# EAGLE board Simple_Motherboard (EAGLE 6.5.0), part 1 of 2
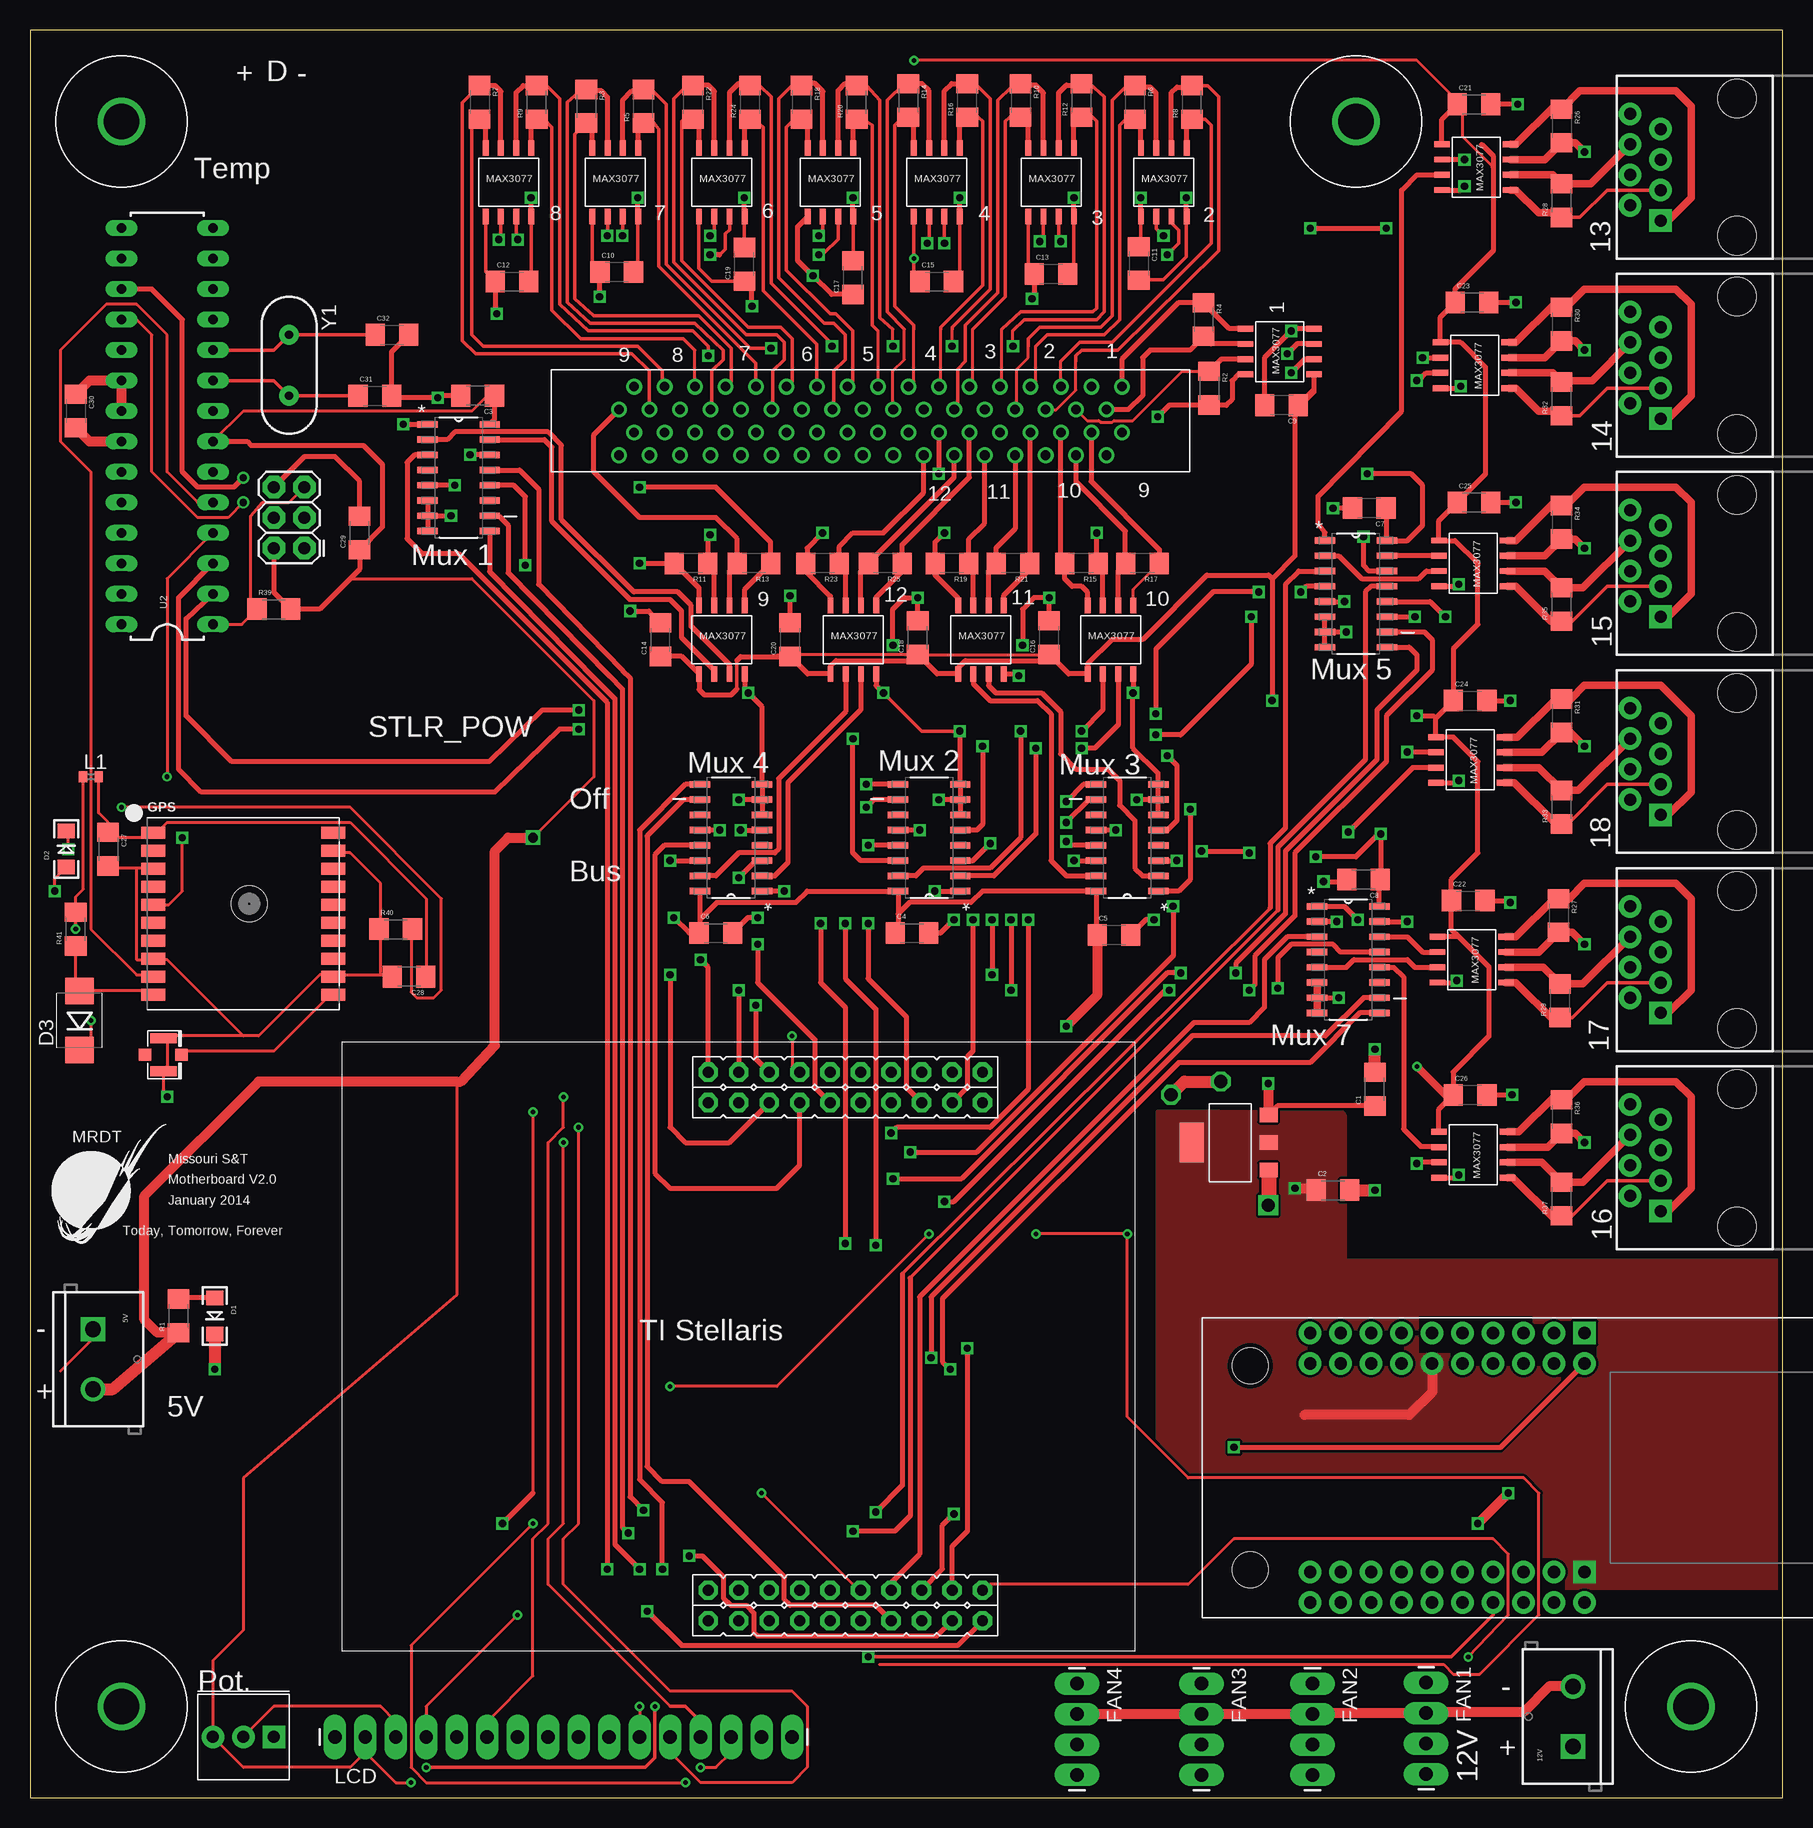
[diagram p0: board, top side]
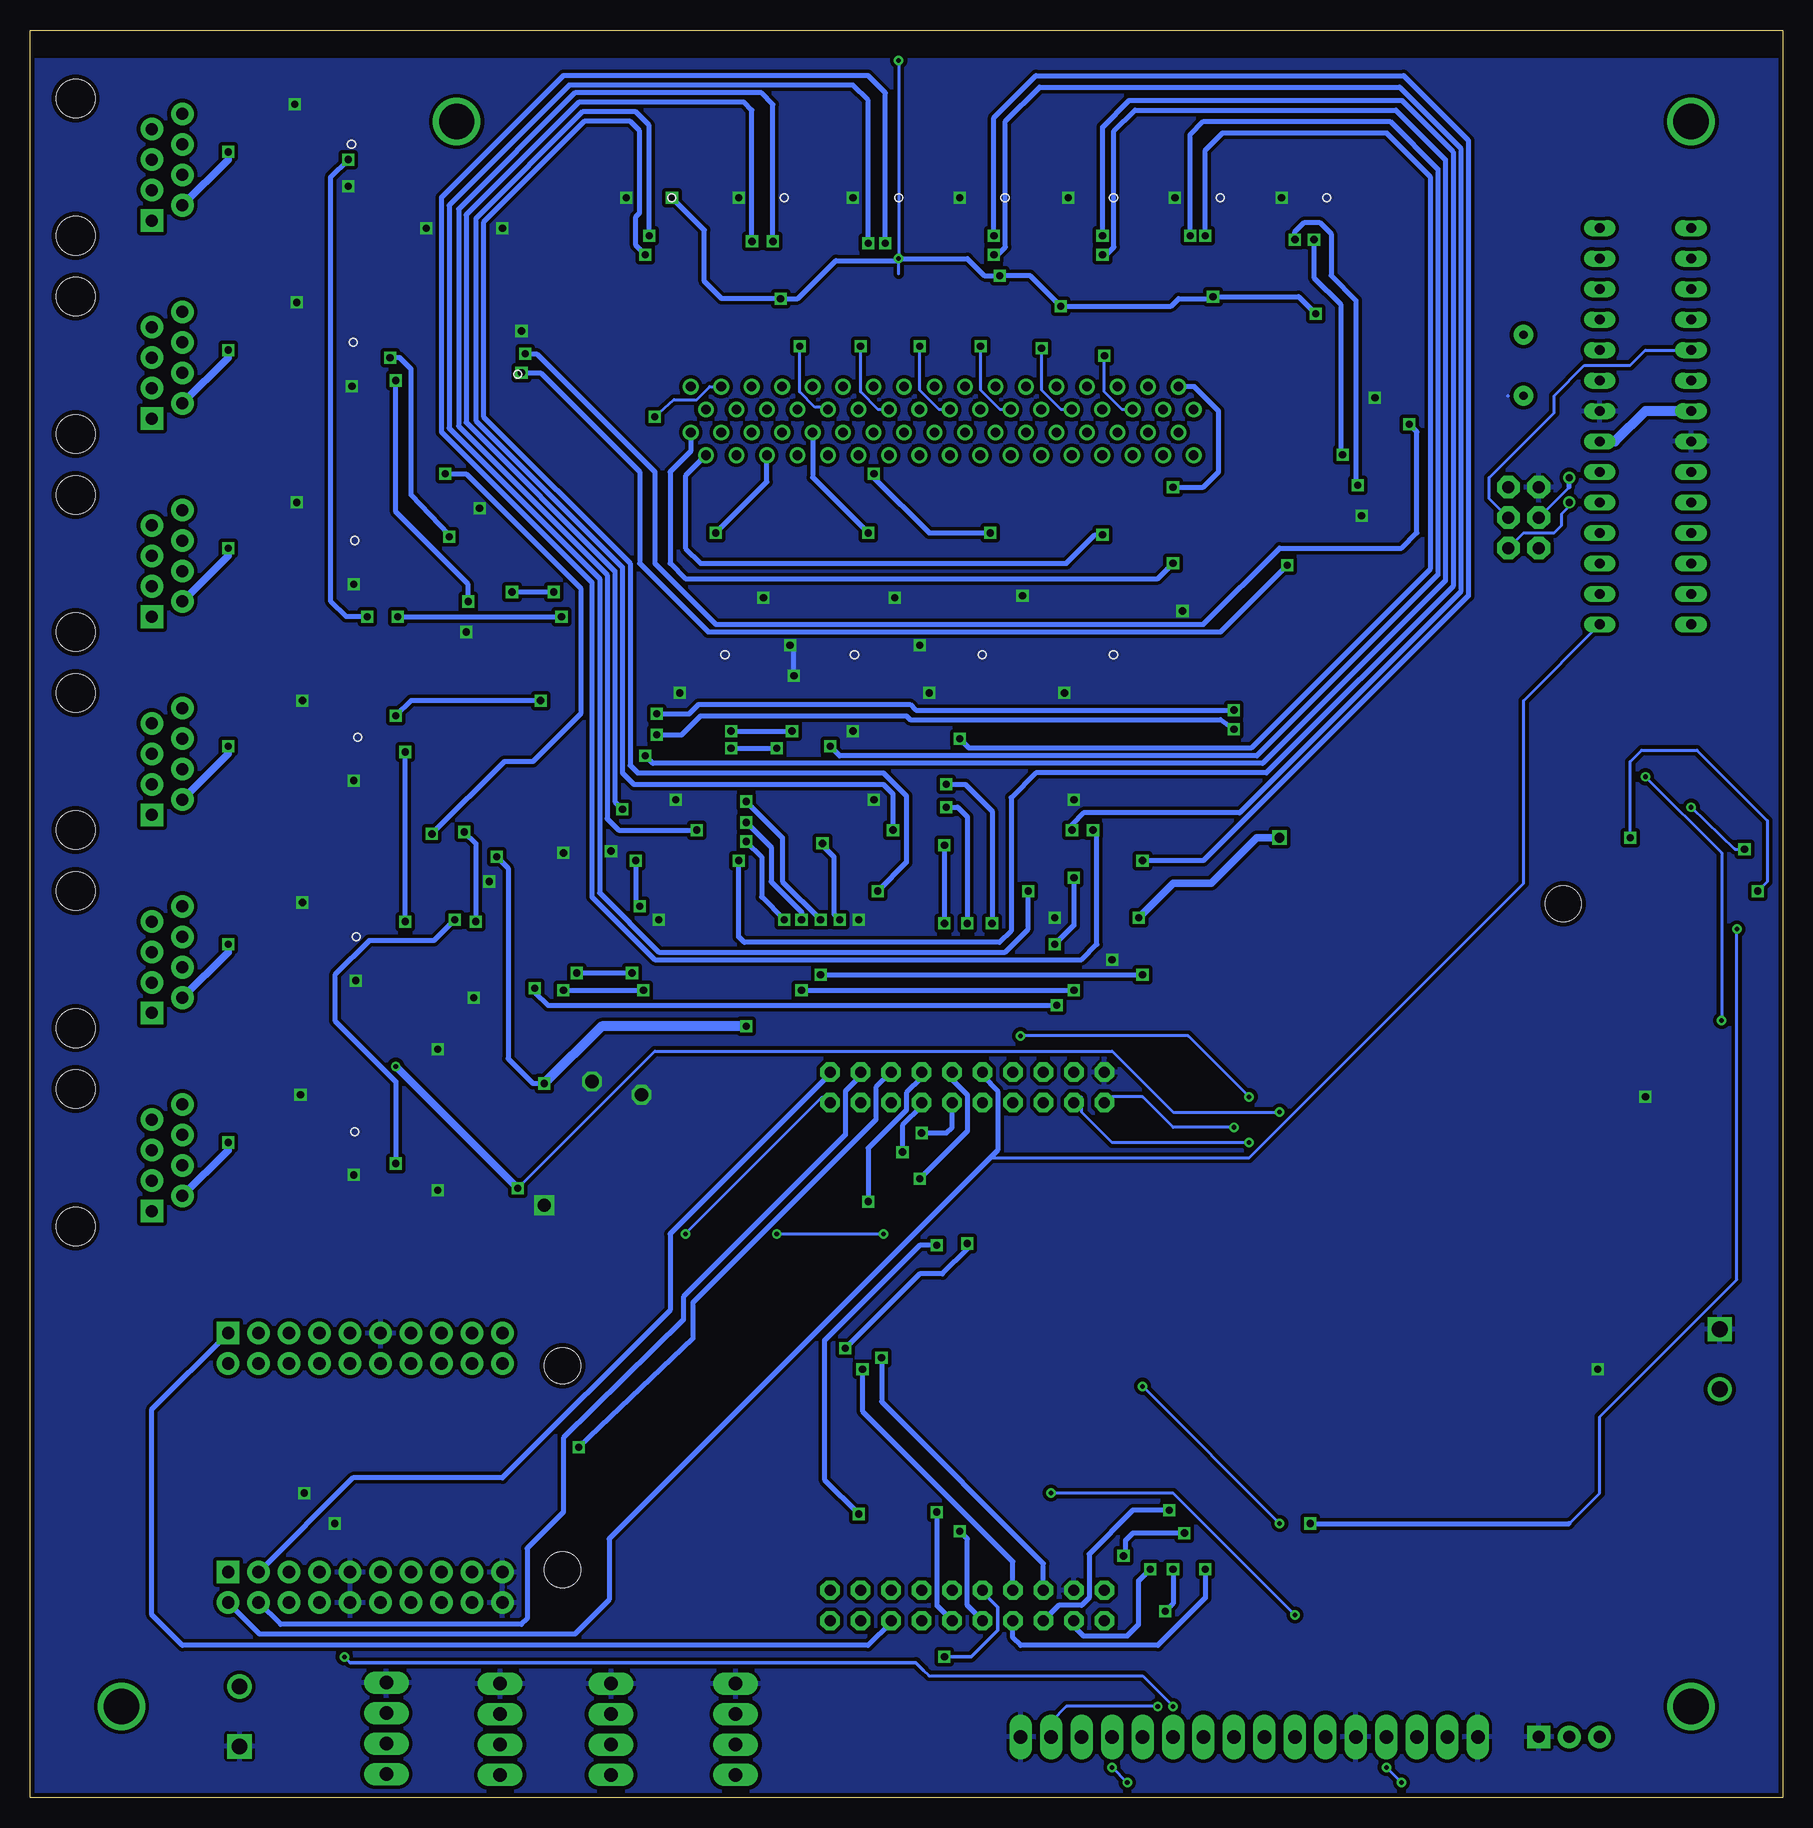
[diagram p1: board, bottom side, seen from below]

Size 146.05 x 147.32 mm. Coordinates in mm from the lower left corner, seen from the top.
Outline: 0,0 146.05,0 146.05,147.32 0,147.32 0,0
Copper layers (1*16): Top 0.035559375mm / dielectric 1.501140625mm / Bottom 0.035559375mm
Design rules "default": minimum track width 10mil, minimum drill 15mil, track to track 8mil, track to pad 6mil, pad to pad 6mil, via to via 6mil, smd to smd 6mil, copper to edge 15mil, drill to drill 8mil, minimum pad ring 10mil, minimum via ring 8mil, stop-mask expansion 4mil, vias tented up to drill 0mil, thermal gap 10mil
tRestrict: area 26.4,30.5 to 33.8,30.5

## Footprints (pad centres in the part's own frame; a part is rotated, then mirrored left to right if it is on the bottom)
SCREWTERMINAL-5MM-2 = drill 1.3 pad 2.032 square: 1 0,0 | drill 1.3 pad 2.032: 2 5,0
1206 = smd 1.6 x 1.8: 1 -1.4,0; 2 1.4,0
LED-1206 = smd 1.2 x 1.4: A -1.5,0; C 1.5,0
DIODE-HV = smd 2.2 x 2.4: A 2.454,0; C -2.454,0
1X04_LONGPADS = drill 1.118 pad 1.88 long: 1 0,0; 2 2.54,0; 3 5.08,0; 4 7.62,0
FGPMMOPA6H = smd 2 x 1: P$1 -7.5,6.75; P$2 -7.5,5.25; P$3 -7.5,3.75; P$4 -7.5,2.25; P$5 -7.5,0.75; P$6 -7.5,-0.75; P$7 -7.5,-2.25; P$8 -7.5,-3.75; P$9 -7.5,-5.25; P$10 -7.5,-6.75; P$11 7.5,-6.75; P$12 7.5,-5.25; P$13 7.5,-3.75; P$14 7.5,-2.25; P$15 7.5,-0.75; P$16 7.5,0.75; P$17 7.5,2.25; P$18 7.5,3.75; P$19 7.5,5.25; P$20 7.5,6.75 | hole 3: 0.5,0.85
H_MNTHOLE_#4 = drill 2.946: 1 0,0
U.FL = smd 2.2 x 0.85: P$1 0,1.375; P$2 0,-1.375 | smd 1.05 x 1: P$3 1.525,0; P$4 -1.525,0
2X3 = drill 1.016 pad 1.88 octagon: 1 0,0; 2 0,2.54; 3 2.54,0; 4 2.54,2.54; 5 5.08,0; 6 5.08,2.54
0402 = smd 0.7 x 0.9: 1 -0.65,0; 2 0.65,0
1X16_LONGPADS = drill 1.118 pad 1.88 long: 1 0,0; 2 2.54,0; 3 5.08,0; 4 7.62,0; 5 10.16,0; 6 12.7,0; 7 15.24,0; 8 17.78,0; 9 20.32,0; 10 22.86,0; 11 25.4,0; 12 27.94,0; 13 30.48,0; 14 33.02,0; 15 35.56,0; 16 38.1,0
MAX3070E = smd 0.49 x 1.3: A -1.905,2.857; B -0.635,2.857; DI 0.635,-2.857; GND 1.905,-2.857; RO -0.635,-2.857; VCC -1.905,-2.857; Y 1.905,2.857; Z 0.635,2.857
WIZ811MJ = drill 1.02 pad 1.88 square: 1 0,0; 21 0,-19.92 | drill 1.02 pad 1.88: 2 0,-2.54; 3 -2.54,0; 4 -2.54,-2.54; 5 -5.08,0; 6 -5.08,-2.54; 7 -7.62,0; 8 -7.62,-2.54; 9 -10.16,0; 10 -10.16,-2.54; 11 -12.7,0; 12 -12.7,-2.54; 13 -15.24,0; 14 -15.24,-2.54; 15 -17.78,0; 16 -17.78,-2.54; 17 -20.32,0; 18 -20.32,-2.54; 19 -22.86,0; 20 -22.86,-2.54; 22 0,-22.46; 23 -2.54,-19.92; 24 -2.54,-22.46; 25 -5.08,-19.92; 26 -5.08,-22.46; 27 -7.62,-19.92; 28 -7.62,-22.46; 29 -10.16,-19.92; 30 -10.16,-22.46; 31 -12.7,-19.92; 32 -12.7,-22.46; 33 -15.24,-19.92; 34 -15.24,-22.46; 35 -17.78,-19.92; 36 -17.78,-22.46; 37 -20.32,-19.92; 38 -20.32,-22.46; 39 -22.86,-19.92; 40 -22.86,-22.46 | hole 3: -27.86,-19.73; -27.86,-2.73
SOIC127P600X175-16N = smd 1.702 x 0.533: 1 -2.591,4.445; 2 -2.591,3.175; 3 -2.591,1.905; 4 -2.591,0.635; 5 -2.591,-0.635; 6 -2.591,-1.905; 7 -2.591,-3.175; 8 -2.591,-4.445; 9 2.591,-4.445; 10 2.591,-3.175; 11 2.591,-1.905; 12 2.591,-0.635; 13 2.591,0.635; 14 2.591,1.905; 15 2.591,3.175; 16 2.591,4.445
DIL28-3 = drill 0.813 long: 1 -16.51,-3.81; 2 -13.97,-3.81; 3 -11.43,-3.81; 4 -8.89,-3.81; 5 -6.35,-3.81; 6 -3.81,-3.81; 7 -1.27,-3.81; 8 1.27,-3.81; 9 3.81,-3.81; 10 6.35,-3.81; 11 8.89,-3.81; 12 11.43,-3.81; 13 13.97,-3.81; 14 16.51,-3.81; 15 16.51,3.81; 16 13.97,3.81; 17 11.43,3.81; 18 8.89,3.81; 19 6.35,3.81; 20 3.81,3.81; 21 1.27,3.81; 22 -1.27,3.81; 23 -3.81,3.81; 24 -6.35,3.81; 25 -8.89,3.81; 26 -11.43,3.81; 27 -13.97,3.81; 28 -16.51,3.81
LD1117SOT-223 = smd 3.3 x 2: (VOUT) 0,3.2 | smd 1.2 x 1.5: GND -2.3,-3.2; VIN 2.3,-3.2; VOUT 0,-3.2
3362U = drill 1.016 pad 1.88 square: P$1 0,2.54 | drill 1.016 pad 1.88: P$2 2.54,2.54; P$3 5.08,2.54
LAUNCHPAD-XL = drill 0.914 pad 1.6 octagon: 3.3V 30.48,2.54; GND1 33.02,5.08; GND2 30.48,48.26; PA2 53.34,48.26; PA3 50.8,48.26; PA4 48.26,48.26; PA5 48.26,2.54; PA6 50.8,2.54; PA7 53.34,2.54; PB0 35.56,2.54; PB1 38.1,2.54; PB2 33.02,48.26; PB3 35.56,45.72; PB4 45.72,2.54; PB5 33.02,2.54; PB6 45.72,48.26; PB7 43.18,48.26; PC4 38.1,45.72; PC5 40.64,45.72; PC6 43.18,45.72; PC7 45.72,45.72; PD0 35.56,5.08; PD1 38.1,5.08; PD2 40.64,5.08; PD3 43.18,5.08; PD6 48.26,45.72; PD7 50.8,45.72; PE0 35.56,48.26; PE1 45.72,5.08; PE2 48.26,5.08; PE3 50.8,5.08; PE4 40.64,2.54; PE5 43.18,2.54; PF0 38.1,48.26; PF1 53.34,5.08; PF2 30.48,45.72; PF3 33.02,45.72; PF4 53.34,45.72; RST 40.64,48.26; VBUS 30.48,5.08
60050685100 = drill 0.8: 1 47.555,7.107; 2 46.285,5.202; 3 45.015,7.107; 4 43.745,5.202; 5 42.475,7.107; 6 41.205,5.202; 7 39.935,7.107; 8 38.665,5.202; 9 37.395,7.107; 10 36.125,5.202; 11 34.855,7.107; 12 33.585,5.202; 13 32.315,7.107; 14 31.045,5.202; 15 29.775,7.107; 16 28.505,5.202; 17 27.235,7.107; 18 25.965,5.202; 19 24.695,7.107; 20 23.425,5.202; 21 22.155,7.107; 22 20.885,5.202; 23 19.615,7.107; 24 18.345,5.202; 25 17.075,7.107; 26 15.805,5.202; 27 14.535,7.107; 28 13.265,5.202; 29 11.995,7.107; 30 10.725,5.202; 31 9.455,7.107; 32 8.185,5.202; 33 6.915,7.107; 34 5.645,5.202; 35 47.555,3.297; 36 46.285,1.393; 37 45.015,3.297; 38 43.745,1.393; 39 42.475,3.297; 40 41.205,1.393; 41 39.935,3.297; 42 38.665,1.393; 43 37.395,3.297; 44 36.125,1.393; 45 34.855,3.297; 46 33.585,1.393; 47 32.315,3.297; 48 31.045,1.393; 49 29.775,3.297; 50 28.505,1.393; 51 27.235,3.297; 52 25.965,1.393; 53 24.695,3.297; 54 23.425,1.393; 55 22.155,3.297; 56 20.885,1.393; 57 19.615,3.297; 58 18.345,1.393; 59 17.075,3.297; 60 15.805,1.393; 61 14.535,3.297; 62 13.265,1.393; 63 11.995,3.297; 64 10.725,1.393; 65 9.455,3.297; 66 8.185,1.393; 67 6.915,3.297; 68 5.645,1.393
RJ45-8 = drill 1 pad 1.88 square: 1 -4.445,6.35 | drill 1 pad 1.88: 2 -3.175,8.89; 3 -1.905,6.35; 4 -0.635,8.89; 5 0.635,6.35; 6 1.905,8.89; 7 3.175,6.35; 8 4.445,8.89 | hole 3.2: -5.715,0; 5.715,0
HC49US = drill 0.7 pad 1.651: 1 -2.54,0; 2 2.54,0

## Placement (x,y rotation side)
5V  M025MM  [SCREWTERMINAL-5MM-2]  5.24,39.05 270 top
12V  M025MM  [SCREWTERMINAL-5MM-2]  128.59,4.29 90 top
C1  100nF  [1206]  112.08,59.05 90 top
C2  10uF  [1206]  108.58,50.64 0 top
C3  0.1uF  [1206]  37.31,116.84 180 top
C4  0.1uF  [1206]  73.5,72.07 0 top
C5  0.1uF  [1206]  90.33,71.91 0 top
C6  0.1uF  [1206]  57.15,72.07 0 top
C7  0.1uF  [1206]  111.6,107.47 180 top
C8  0.1uF  [1206]  111.12,76.52 180 top
C9  0.1uF  [1206]  104.3,116.05 180 top
C10  0.1uF  [1206]  48.9,127.16 0 top
C11  0.1uF  [1206]  92.39,127.86 270 top
C12  0.1uF  [1206]  40.16,126.36 0 top
C13  0.1uF  [1206]  85.09,127 0 top
C14  0.1uF  [1206]  52.55,96.52 90 top
C15  0.1uF  [1206]  75.56,126.36 0 top
C16  0.1uF  [1206]  84.93,96.68 90 top
C17  0.1uF  [1206]  68.58,126.68 90 top
C18  0.1uF  [1206]  73.98,96.68 90 top
C19  0.1uF  [1206]  59.53,127.79 90 top
C20  0.1uF  [1206]  63.34,96.52 90 top
C21  0.1uF  [1206]  120.33,141.13 0 top
C22  0.1uF  [1206]  119.86,74.77 0 top
C23  0.1uF  [1206]  120.17,124.62 0 top
C24  0.1uF  [1206]  120.02,91.44 0 top
C25  0.1uF  [1206]  120.33,107.95 0 top
C26  0.1uF  [1206]  120.02,58.58 0 top
C27  .01uF  [1206]  6.51,79.06 270 top
C28  1uF  [1206]  31.59,68.42 180 top
C29  0.1uF  [1206]  27.46,105.41 90 top
C30  0.1uF  [1206]  3.81,115.57 270 top
C31  22pF  [1206]  28.73,116.84 0 top
C32  22pF  [1206]  30.16,121.92 0 top
D1  GREEN  [LED-1206]  15.4,40.16 270 top
D2  RED  [LED-1206]  3.02,79.06 90 top
D3  [DIODE-HV]  4.13,64.77 90 top
FAN1  [1X04_LONGPADS]  116.35,9.6 270 top
FAN2  [1X04_LONGPADS]  106.87,9.53 270 top
FAN3  [1X04_LONGPADS]  97.63,9.53 270 top
FAN4  [1X04_LONGPADS]  87.25,9.53 270 top
GPS  [FGPMMOPA6H]  17.78,73.66 0 top
H1  [H_MNTHOLE_#4]  7.62,7.62 0 top
H2  [H_MNTHOLE_#4]  138.43,7.62 0 top
H3  [H_MNTHOLE_#4]  110.49,139.7 0 top
H4  [H_MNTHOLE_#4]  7.62,139.7 0 top
J1  U.FL  [U.FL]  11.11,61.91 0 top
J2  AVR_SPI_PRG_6PTH  [2X3]  22.86,104.14 90 top
L1  BML15HB121SN1  [0402]  5.08,85.09 0 top
LCD  M16LONGPADS  [1X16_LONGPADS]  25.4,5.08 0 top
R1  330  [1206]  12.38,40.16 90 top
R2  120  [1206]  98.27,117.47 270 top
R3  120  [1206]  46.35,140.97 270 top
R4  120  [1206]  97.79,123.19 270 top
R5  120  [1206]  51.12,140.97 90 top
R6  120  [1206]  92.08,141.29 270 top
R7  120  [1206]  37.47,141.29 270 top
R8  120  [1206]  96.84,141.29 90 top
R9  120  [1206]  42.23,141.29 90 top
R10  120  [1206]  82.55,141.45 270 top
R11  120  [1206]  55.09,102.87 180 top
R12  120  [1206]  87.63,141.45 90 top
R13  120  [1206]  60.33,102.87 180 top
R14  120  [1206]  73.18,141.45 270 top
R15  120  [1206]  87.63,102.87 180 top
R16  120  [1206]  78.11,141.45 90 top
R17  120  [1206]  92.71,102.87 180 top
R18  120  [1206]  64.29,141.29 270 top
R19  120  [1206]  76.83,102.87 180 top
R20  120  [1206]  68.9,141.29 90 top
R21  120  [1206]  81.92,102.87 180 top
R22  120  [1206]  55.24,141.29 270 top
R23  120  [1206]  66.04,102.87 180 top
R24  120  [1206]  60.01,141.29 90 top
R25  120  [1206]  71.28,102.87 180 top
R26  120  [1206]  127.64,139.32 270 top
R27  120  [1206]  127.38,73.53 270 top
R28  120  [1206]  127.64,133.1 90 top
R29  120  [1206]  127.51,66.42 90 top
R30  120  [1206]  127.64,122.81 270 top
R31  120  [1206]  127.64,90.17 270 top
R32  120  [1206]  127.64,116.59 90 top
R33  120  [1206]  127.64,82.55 90 top
R34  120  [1206]  127.64,106.3 270 top
R35  120  [1206]  127.64,99.44 90 top
R36  120  [1206]  127.64,56.77 270 top
R37  120  [1206]  127.64,49.91 90 top
R39  10k  [1206]  20.32,99.06 0 top
R40  1K  [1206]  30.48,72.39 0 top
R41  1K  [1206]  3.81,72.39 90 top
RS-485-1  MAX3077  [MAX3070E]  120.52,135.89 270 top
RS-485-2  MAX3077  [MAX3070E]  120.14,69.85 270 top
RS-485-3  MAX3077  [MAX3070E]  120.4,119.38 270 top
RS-485-4  MAX3077  [MAX3070E]  120.02,86.49 270 top
RS-485-5  MAX3077  [MAX3070E]  120.27,102.87 270 top
RS-485-6  MAX3077  [MAX3070E]  120.27,53.59 270 top
RS_TRANS_1  MAX3077  [MAX3070E]  104.14,120.52 90 top
RS_TRANS_2  MAX3077  [MAX3070E]  48.77,134.62 0 top
RS_TRANS_3  MAX3077  [MAX3070E]  94.49,134.62 0 top
RS_TRANS_4  MAX3077  [MAX3070E]  39.88,134.62 0 top
RS_TRANS_5  MAX3077  [MAX3070E]  85.09,134.62 0 top
RS_TRANS_6  MAX3077  [MAX3070E]  57.66,96.52 0 top
RS_TRANS_7  MAX3077  [MAX3070E]  75.56,134.62 0 top
RS_TRANS_8  MAX3077  [MAX3070E]  90.04,96.52 0 top
RS_TRANS_9  MAX3077  [MAX3070E]  66.71,134.62 0 top
RS_TRANS_10  MAX3077  [MAX3070E]  79.25,96.52 0 top
RS_TRANS_11  MAX3077  [MAX3070E]  57.66,134.62 0 top
RS_TRANS_12  MAX3077  [MAX3070E]  68.61,96.52 0 top
U1  WIZ811MJ  [WIZ811MJ]  129.54,38.73 0 top
U1_MUX  74HC4052D,653  [SOIC127P600X175-16N]  35.72,110.01 0 top
U2  ATMEGA328P_PDIP  [DIL28-3]  11.43,114.3 90 top
U2_MUX  74HC4052D,653  [SOIC127P600X175-16N]  74.93,80.01 180 top
U3_MUX  74HC4052D,653  [SOIC127P600X175-16N]  91.44,80.01 180 top
U4_MUX  74HC4052D,653  [SOIC127P600X175-16N]  58.42,80.01 180 top
U5_MUX  74HC4052D,653  [SOIC127P600X175-16N]  110.49,100.33 0 top
U7_MUX  74HC4052D,653  [SOIC127P600X175-16N]  109.86,69.85 0 top
U$1  LD1117  [LD1117SOT-223]  100.01,54.61 90 top
U$2  10k  [3362U]  20.32,7.62 180 top
U$3  STELLARIS-LAUNCHPADSTELLARIS-LAUNCHPAD-XL  [LAUNCHPAD-XL]  26.04,12.22 0 top
U$4  TB60050685100  [60050685100]  43.43,110.49 0 top
U$5  RJ45-8PTH  [RJ45-8]  142.24,135.89 90 top
U$6  RJ45-8PTH  [RJ45-8]  142.24,69.85 90 top
U$7  RJ45-8PTH  [RJ45-8]  142.24,119.38 90 top
U$8  RJ45-8PTH  [RJ45-8]  142.24,86.36 90 top
U$9  RJ45-8PTH  [RJ45-8]  142.24,102.87 90 top
U$10  RJ45-8PTH  [RJ45-8]  142.24,53.34 90 top
Y1  16MHz  [HC49US]  21.59,119.38 270 top

## Library data of the parts
5V 12V FAN1-FAN4 J1 J2 LCD U$5-U$10 = SparkFun-Connectors
C1-C32 R1-R37 R40 R41 = SparkFun-Passives
D1 = SparkFun-LED; PROD_ID: DIO-00862
D2 = SparkFun-LED; PROD_ID: DIO-00809
D3 = SparkFun-DiscreteSemi
GPS = adafruit
H1-H4 = Lib_TH
L1 = inductors
R39 = SparkFun-Resistors
RS-485-1-RS-485-6 RS_TRANS_1-RS_TRANS_12 = MAX3077
U1 = SparkFun-Boards
U1_MUX U2_MUX U3_MUX U4_MUX U5_MUX U7_MUX = 4x1_Dual_Mux; MPN: 74HC4052D,653; OC_FARNELL: 1826642; OC_NEWARK: 78R7402; PACKAGE: SO-16; SUPPLIER: NXP
U2 = SparkFun-DigitalIC
U$1 = LD1117
U$2 = SparkFun-Electromechanical
U$3 = StellarisLaunchPad_Fred
U$4 = harting-scsi
Y1 = SparkFun-FreqCtrl

## Nets
1_RX+: R2.2 RS_TRANS_1.A U$4.3
1_RX-: R2.1 RS_TRANS_1.B U$4.4
1_TX+: R4.1 RS_TRANS_1.Y U$4.1
1_TX-: R4.2 RS_TRANS_1.Z U$4.2
2_RX+: R6.2 RS_TRANS_3.A U$4.7
2_RX-: R6.1 RS_TRANS_3.B U$4.8
2_TX+: R8.1 RS_TRANS_3.Y U$4.5
2_TX-: R8.2 RS_TRANS_3.Z U$4.6
3.3V: U$3.3.3V
3_RX+: R10.2 RS_TRANS_5.A U$4.11
3_RX-: R10.1 RS_TRANS_5.B U$4.12
3_TX+: R12.1 RS_TRANS_5.Y U$4.9
3_TX-: R12.2 RS_TRANS_5.Z U$4.10
4_RX+: R14.2 RS_TRANS_7.A U$4.15
4_RX-: R14.1 RS_TRANS_7.B U$4.16
4_TX+: R16.1 RS_TRANS_7.Y U$4.13
4_TX-: R16.2 RS_TRANS_7.Z U$4.14
5_RX+: R18.2 RS_TRANS_9.A U$4.19
5_RX-: R18.1 RS_TRANS_9.B U$4.20
5_TX+: R20.1 RS_TRANS_9.Y U$4.17
5_TX-: R20.2 RS_TRANS_9.Z U$4.18
6_RX+: R22.2 RS_TRANS_11.A U$4.23
6_RX-: R22.1 RS_TRANS_11.B U$4.24
6_TX+: R24.1 RS_TRANS_11.Y U$4.21
6_TX-: R24.2 RS_TRANS_11.Z U$4.22
7_RX+: R3.2 RS_TRANS_2.A U$4.27
7_RX-: R3.1 RS_TRANS_2.B U$4.28
7_TX+: R5.1 RS_TRANS_2.Y U$4.25
7_TX-: R5.2 RS_TRANS_2.Z U$4.26
8_RX+: R7.2 RS_TRANS_4.A U$4.31
8_RX-: R7.1 RS_TRANS_4.B U$4.32
8_TX+: R9.1 RS_TRANS_4.Y U$4.29
8_TX-: R9.2 RS_TRANS_4.Z U$4.30
9_RX+: R11.2 RS_TRANS_6.A U$4.35
9_RX-: R11.1 RS_TRANS_6.B U$4.36
9_TX+: R13.1 RS_TRANS_6.Y U$4.33
9_TX-: R13.2 RS_TRANS_6.Z U$4.34
10_RX+: R15.2 RS_TRANS_8.A U$4.39
10_RX-: R15.1 RS_TRANS_8.B U$4.40
10_TX+: R17.1 RS_TRANS_8.Y U$4.37
10_TX-: R17.2 RS_TRANS_8.Z U$4.38
11_RX+: R19.2 RS_TRANS_10.A U$4.43
11_RX-: R19.1 RS_TRANS_10.B U$4.44
11_TX+: R21.1 RS_TRANS_10.Y U$4.41
11_TX-: R21.2 RS_TRANS_10.Z U$4.42
12_RX+: R23.2 RS_TRANS_12.A U$4.47
12_RX-: R23.1 RS_TRANS_12.B U$4.48
12_TX+: R25.1 RS_TRANS_12.Y U$4.45
12_TX-: R25.2 RS_TRANS_12.Z U$4.46
328_RX: U2.2 U5_MUX.4
328_TX: U2.3 U5_MUX.11
+3V3: C2.1 C9.1 C10.1 C11.1 C12.1 C13.1 C14.1 C15.1 C16.1 C17.1 C18.1 C19.1 C20.1 C21.1 C22.1 C23.1 C24.1 C25.1 C26.1 L1.1 R41.2 RS-485-1.VCC RS-485-2.VCC RS-485-3.VCC RS-485-4.VCC RS-485-5.VCC RS-485-6.VCC RS_TRANS_1.VCC RS_TRANS_2.VCC RS_TRANS_3.VCC RS_TRANS_4.VCC RS_TRANS_5.VCC RS_TRANS_6.VCC RS_TRANS_7.VCC RS_TRANS_8.VCC RS_TRANS_9.VCC RS_TRANS_10.VCC RS_TRANS_11.VCC RS_TRANS_12.VCC U1.12 U1.21 U$1.(VOUT) U$1.VOUT
+5V: 5V.2 C1.1 C3.1 C4.1 C5.1 C6.1 C7.1 C8.1 C29.1 C30.1 J2.2 LCD.2 LCD.15 R1.1 R39.2 U1_MUX.16 U2.7 U2.20 U2.21 U2_MUX.16 U3_MUX.16 U4_MUX.16 U5_MUX.16 U7_MUX.16 U$1.VIN U$2.P$3
+12V: 12V.2 FAN1.2 FAN2.2 FAN3.2 FAN4.2
AT_MISO: J2.1 U2.18
AT_MOSI: J2.4 U2.17
AT_SCK: J2.3 U2.19
ATCLK3: C32.1 U2.10 Y1.1
ATCLK4: C31.1 U2.9 Y1.2
BLUETH_CTS: U2.13
BLUETH_RTS: U2.12
BLUETH_RXD: U2.11
BLUETH_TXD: U2.6
GND: 5V.1 12V.1 C1.2 C2.2 C3.2 C4.2 C5.2 C6.2 C7.2 C8.2 C9.2 C10.2 C11.2 C12.2 C13.2 C14.2 C15.2 C16.2 C17.2 C18.2 C19.2 C20.2 C21.2 C22.2 C23.2 C24.2 C25.2 C26.2 C27.2 C28.2 C29.2 C30.2 C31.2 C32.2 D1.C FAN1.1 FAN2.1 FAN3.1 FAN4.1 GPS.P$3 GPS.P$8 GPS.P$12 GPS.P$19 J1.P$1 J1.P$2 J2.6 LCD.1 LCD.5 LCD.16 R40.1 RS-485-1.GND RS-485-2.GND RS-485-3.GND RS-485-4.GND RS-485-5.GND RS-485-6.GND RS_TRANS_1.GND RS_TRANS_2.GND RS_TRANS_3.GND RS_TRANS_4.GND RS_TRANS_5.GND RS_TRANS_6.GND RS_TRANS_7.GND RS_TRANS_8.GND RS_TRANS_9.GND RS_TRANS_10.GND RS_TRANS_11.GND RS_TRANS_12.GND U1.11 U1.29 U1.30 U1.39 U1.40 U1_MUX.6 U1_MUX.7 U1_MUX.8 U2.8 U2.22 U2_MUX.6 U2_MUX.7 U2_MUX.8 U3_MUX.6 U3_MUX.7 U3_MUX.8 U4_MUX.6 U4_MUX.7 U4_MUX.8 U5_MUX.6 U5_MUX.7 U5_MUX.8 U7_MUX.6 U7_MUX.7 U7_MUX.8 U$1.GND U$2.P$1 U$3.GND1 U$3.GND2
GPS_RX: D3.C U2.4
GPS_TX: GPS.P$9 U2.5
LCD_D4: LCD.11 U$3.PF1
LCD_D5: LCD.12 U$3.PF2
LCD_D6: LCD.13 U$3.PF3
LCD_D7: LCD.14 U$3.PF4
LCD_EN: LCD.6 U$3.PF0
LCD_RS: LCD.4 U$3.PD3
N$1: R26.1 RS-485-1.A U$5.1
N$2: R26.2 RS-485-1.B U$5.2
N$4: R28.1 RS-485-1.Y U$5.3
N$5: GPS.P$11 J1.P$3
N$6: D2.C R40.2
N$7: LCD.3 U$2.P$2
N$8: R32.2 RS-485-3.Z U$7.6
N$9: R28.2 RS-485-1.Z U$5.6
N$10: R30.1 RS-485-3.A U$7.1
N$11: R30.2 RS-485-3.B U$7.2
N$12: R32.1 RS-485-3.Y U$7.3
N$13: R35.2 RS-485-5.Z U$9.6
N$14: R34.1 RS-485-5.A U$9.1
N$15: R34.2 RS-485-5.B U$9.2
N$16: R35.1 RS-485-5.Y U$9.3
N$17: R37.2 RS-485-6.Z U$10.6
N$18: R36.1 RS-485-6.A U$10.1
N$19: R36.2 RS-485-6.B U$10.2
N$20: R37.1 RS-485-6.Y U$10.3
N$21: R29.2 RS-485-2.Z U$6.6
N$22: R27.1 RS-485-2.A U$6.1
N$23: D2.A GPS.P$5
N$24: D3.A GPS.P$10 R41.1
N$28: R27.2 RS-485-2.B U$6.2
N$29: R29.1 RS-485-2.Y U$6.3
N$33: R33.2 RS-485-4.Z U$8.6
N$34: R31.1 RS-485-4.A U$8.1
N$35: R31.2 RS-485-4.B U$8.2
N$36: R33.1 RS-485-4.Y U$8.3
N$45: D1.A R1.2
N$47: C27.1 C28.1 GPS.P$1 L1.2
RESET: J2.5 R39.1 U1.22 U2.1 U$3.RST
RS485_1_RX: RS_TRANS_1.RO U1_MUX.12
RS485_1_TX: RS_TRANS_1.DI U1_MUX.1
RS485_2_RX: RS_TRANS_3.RO U2_MUX.12
RS485_2_TX: RS_TRANS_3.DI U2_MUX.1
RS485_3_RX: RS_TRANS_5.RO U3_MUX.12
RS485_3_TX: RS_TRANS_5.DI U3_MUX.1
RS485_4_RX: RS_TRANS_7.RO U4_MUX.12
RS485_4_TX: RS_TRANS_7.DI U4_MUX.1
RS485_5_RX: RS_TRANS_9.RO U4_MUX.14
RS485_5_TX: RS_TRANS_9.DI U4_MUX.5
RS485_6_RX: RS_TRANS_11.RO U3_MUX.14
RS485_6_TX: RS_TRANS_11.DI U3_MUX.5
RS485_7_RX: RS_TRANS_2.RO U2_MUX.14
RS485_7_TX: RS_TRANS_2.DI U2_MUX.5
RS485_8_RX: RS_TRANS_4.RO U1_MUX.14
RS485_8_TX: RS_TRANS_4.DI U1_MUX.5
RS485_9_RX: RS_TRANS_6.RO U1_MUX.15
RS485_9_TX: RS_TRANS_6.DI U1_MUX.2
RS485_10_RX: RS_TRANS_8.RO U2_MUX.15
RS485_10_TX: RS_TRANS_8.DI U2_MUX.2
RS485_11_RX: RS_TRANS_10.RO U3_MUX.15
RS485_11_TX: RS_TRANS_10.DI U3_MUX.2
RS485_12_RX: RS_TRANS_12.RO U4_MUX.15
RS485_12_TX: RS_TRANS_12.DI U4_MUX.2
RS485_13_RX: RS-485-1.RO U5_MUX.12
RS485_13_TX: RS-485-1.DI U5_MUX.1
RS485_14_RX: RS-485-3.RO U5_MUX.14
RS485_14_TX: RS-485-3.DI U5_MUX.5
RS485_15_RX: RS-485-5.RO U5_MUX.15
RS485_15_TX: RS-485-5.DI U5_MUX.2
RS485_16_RX: RS-485-6.RO U7_MUX.12
RS485_16_TX: RS-485-6.DI U7_MUX.1
RS485_17_RX: RS-485-2.RO U7_MUX.14
RS485_17_TX: RS-485-2.DI U7_MUX.5
RS485_18_RX: RS-485-4.RO U7_MUX.15
RS485_18_TX: RS-485-4.DI U7_MUX.2
TCP_INT: U1.28 U$3.PD2
TCP_MISO: U1.2 U$3.PA4
TCP_MOSI: U1.1 U$3.PA5
TCP_SCLK: U1.23 U$3.PA2
TCP_SS: U1.24 U$3.PA3
TEMP: U2.23
U1_MUX_S0: U1_MUX.10 U$3.PA6
U1_MUX_S1: U1_MUX.9 U$3.PA7
U1RX: U1_MUX.13 U$3.PB0
U1TX: U1_MUX.3 U$3.PB1
U2_MUX_S0: U2_MUX.10 U$3.PE2
U2_MUX_S1: U2_MUX.9 U$3.PE3
U2RX: U2_MUX.13 U$3.PD6
U2TX: U2_MUX.3 U$3.PD7
U3_MUX_S0: U3_MUX.10 U$3.PB2
U3_MUX_S1: U3_MUX.9 U$3.PB3
U3RX: U3_MUX.13 U$3.PC6
U3TX: U3_MUX.3 U$3.PC7
U4_MUX_S0: U4_MUX.10 U$3.PB4
U4_MUX_S1: U4_MUX.9 U$3.PB5
U4RX: U4_MUX.13 U$3.PC4
U4TX: U4_MUX.3 U$3.PC5
U5_MUX_S0: U5_MUX.10 U$3.PB6
U5_MUX_S1: U5_MUX.9 U$3.PB7
U5RX: U5_MUX.13 U$3.PE4
U5TX: U5_MUX.3 U$3.PE5
U7_MUX_S0: U7_MUX.10 U$3.PD0
U7_MUX_S1: U7_MUX.9 U$3.PD1
U7RX: U7_MUX.13 U$3.PE0
U7TX: U7_MUX.3 U$3.PE1
VBUS: U$3.VBUS